# Altium PCB PCB1.PcbDoc
Units mil, origin at the board's own origin, x right, y up, seen from the top; angles counter-clockwise.
Board outline 2670 x 1265 mil, 2 copper layers (Top Layer, Bottom Layer); 14 components, 12 nets, 37 pads, 9 vias.
Unrouted connection lines stored in the file: 1.
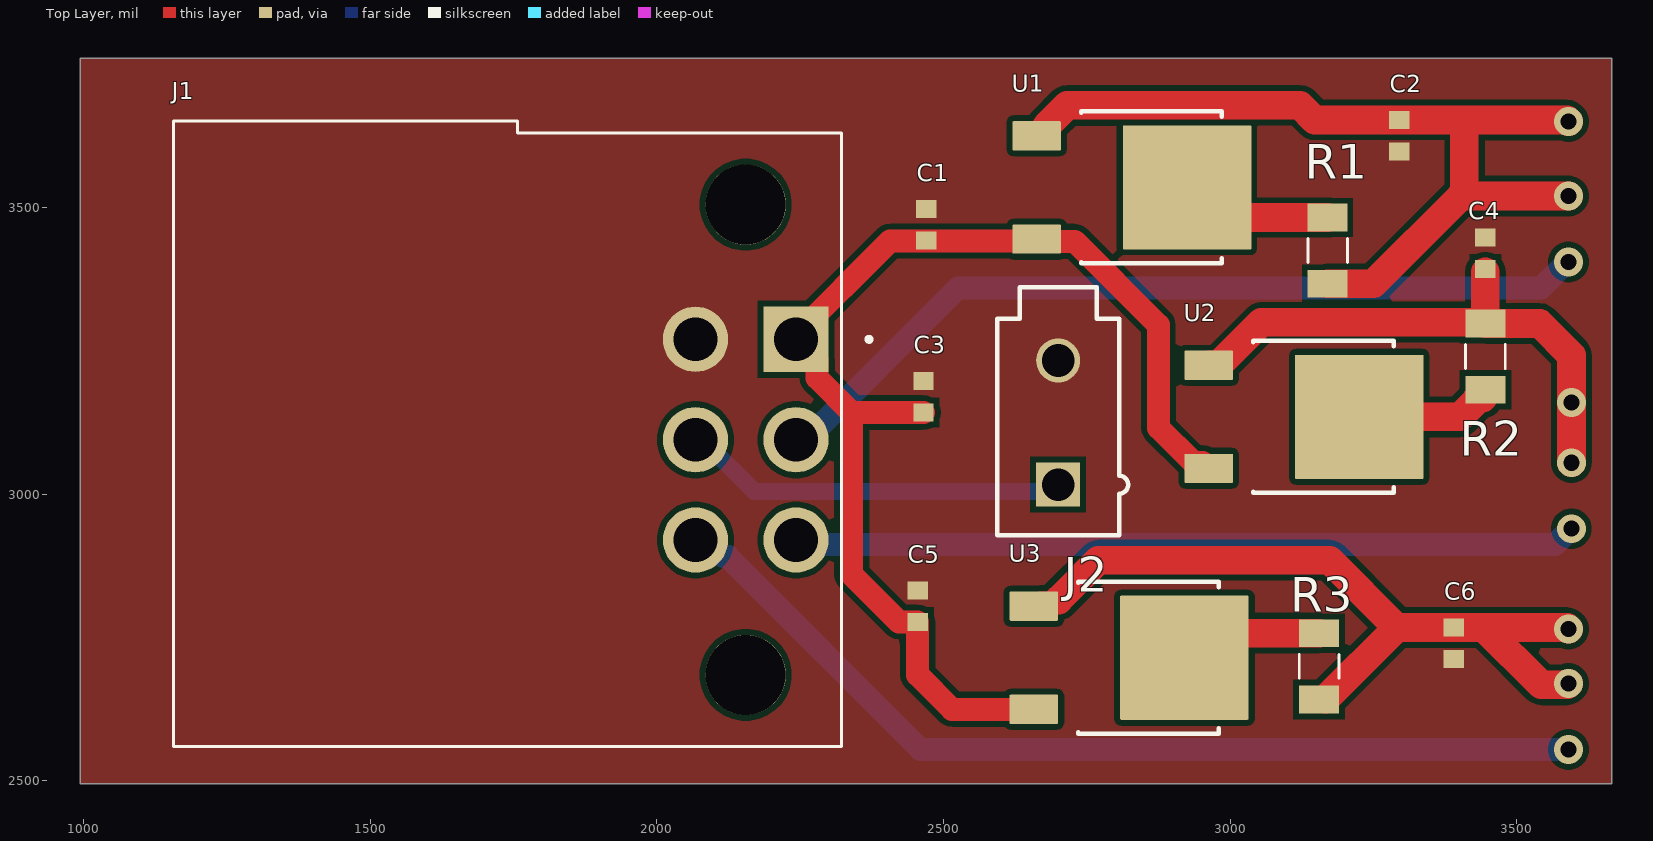
[diagram p0: Top Layer view]
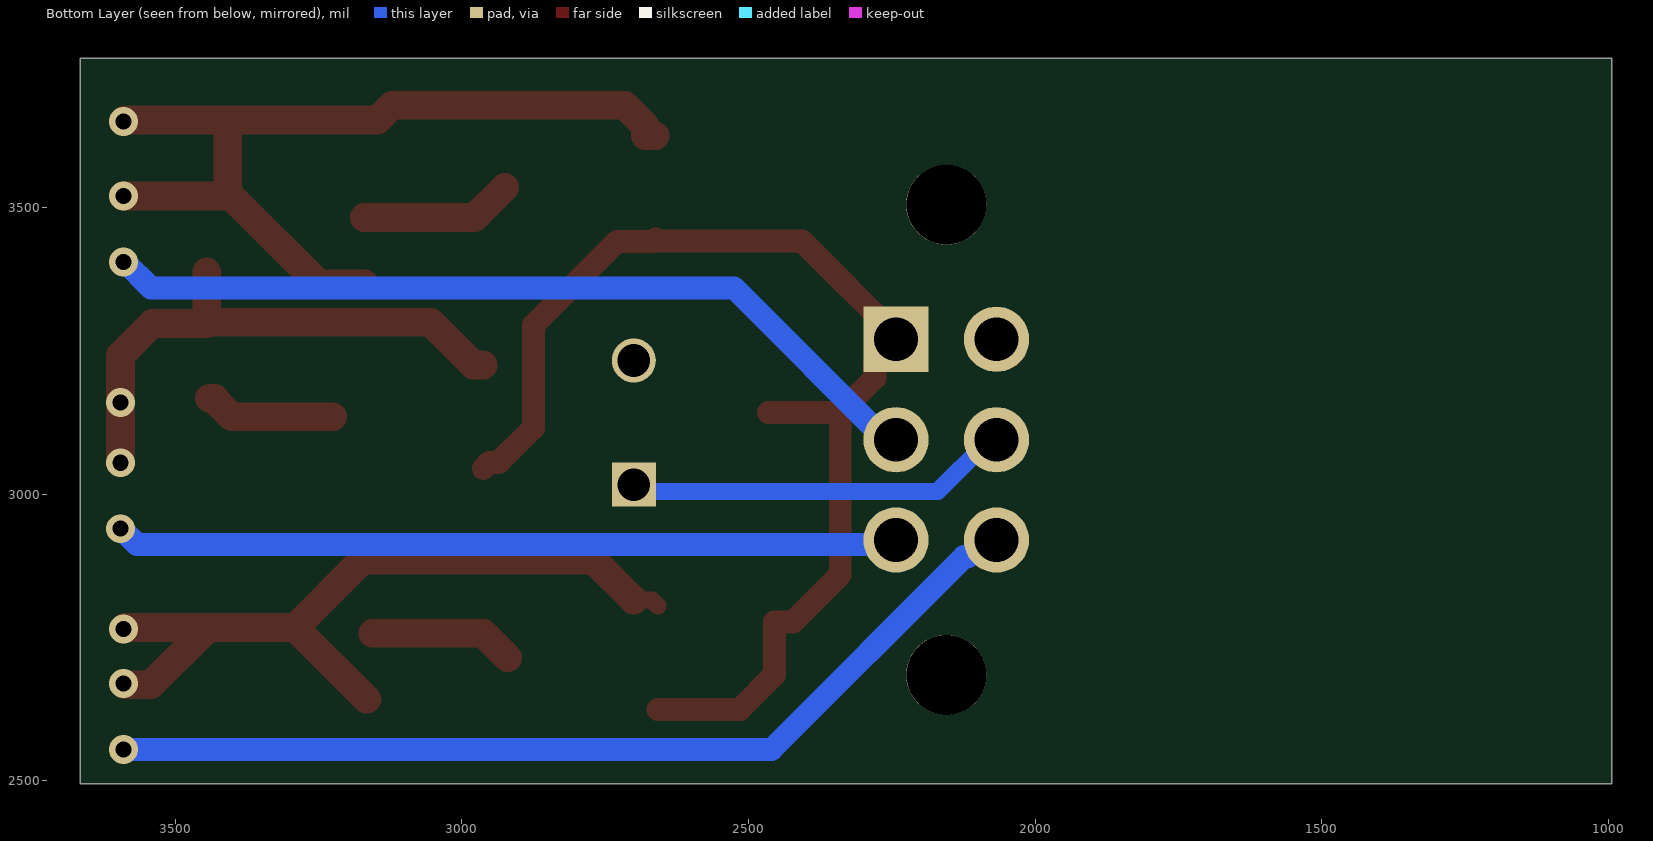
[diagram p1: Bottom Layer view, seen from below]

## Layer stack, top to bottom
Top Solder: solder mask 0.4, Solder Resist, Dk 3.5
Top Layer: signal copper 1.4
Dielectric 1: dielectric 12.6, FR-4, Dk 4.8
Bottom Layer: signal copper 1.4
Bottom Solder: solder mask 0.4, Solder Resist, Dk 3.5

## Board outline
995,3760 3665,3760 3665,2495 995,2495

## Design rules (kind name [scope] priority, off if disabled: settings)
Clearance [All] p1: gap=10 ignorepadtopadclearanceinfootprint=FALSE
PolygonConnect [All] p1: connectstyle=Direct reliefconductorwidth=10 reliefentries=4 polygonreliefangle="90 Angle" airgapwidth=10
RoutingVias [All] p1: holewidth=28 width=50 viastyle="Through Hole" minholewidth=28 minwidth=50 maxholewidth=28 maxwidth=50
SolderMaskExpansion [All] p1: expansion=4 istentingtop=FALSE
SupplyNets "Schematic Supply Nets_3" [InNet('Status_Light_PWR')] p1: voltage=0.000
SupplyNets "Schematic Supply Nets" [InNet('GND')] p2: voltage=0.000
Width [All] p1: maxlimit=50 minlimit=10 preferedwidth=10
30 further rules are at their usual default settings.

## Components (designator, comment, footprint, x,y, rotation, side; value= is the part's Value field where it differs from the comment)
C1 "Cap" 1608[0603] 2470,3470 r90 top
C2 "Cap" 1608[0603] 3295,3625 r90 top
C3 "Cap" 1608[0603] 2465,3170 r90 top
C4 "Cap" 1608[0603] 3445,3420 r270 top
C5 "Cap" 1608[0603] 2455,2805 r90 top
C6 "Cap" 1608[0603] 3390,2740 r90 top
J1 "DTF13-6P" TE_DTF13-6P 2155,3095.04 r270 top
J2 "39-28-1023" MOLX-39-28-1023-2_V 2700,3125 r180 top
R1 "3ohms" RESC3216X70N#1 3170,3425 r270 top
R2 "3ohms" RESC3216X70N#2 3445,3240 r90 top
R3 "3 ohms" RESC3216X70N#1 3155,2700 r270 top
U1 "LM317AMDTX/NOPB" FP-NDP0003B-MFG 2835,3535 r0 top
U2 "LM317AMDTX/NOPB" FP-NDP0003B-MFG 3135,3135 r0 top
U3 "LM317AMDTX/NOPB" FP-NDP0003B-MFG 2830.04,2715 r0 top

## Footprints (in the part's own frame and the unit in brackets; to place one, negate y for a bottom-side part, rotate by r counter-clockwise, add the part's x,y. Pads: shape width x height; smd on the part's side, far side on the other; paste and mask are expansions set on the pad)
1608[0603] [mm] "Chip Capacitor, Body 1.6x0.8mm, IPC High Density"
  rect 0.8x0.9 smd: 1(-0.7,0) 2(0.7,0)
  body extent -0.87,-0.48 0.87,0.48, height 1.3
FP-NDP0003B-MFG [mm]
  rrect8% 2.15x1.3 smd paste+0 mask+0: 1(-4.38,2.285) 3(-4.38,-2.285)
  rrect2% 5.7x5.5 smd paste-1000 mask+0: 4(2.285,0)
  silkscreen extent -2.41,-3.36 3.81,3.36, body extent -5.56,-3.46 5.23,3.46, height 0.25
MOLX-39-28-1023-2_V [mm] "THD, 2-Leads, Body 11x5.8mm"
  rect 1.95x1.95 hole 1.45: 1(0,2.75)
  round 1.95 hole 1.45: 2(0,-2.75)
  silkscreen extent -3.1,-6 2.7,5, body extent -3.1,-6 2.7,5, height 13.6
RESC3216X70N#1 [mm]
  rect 1.23x1.77 smd: 1(-1.466,0) 2(1.466,0)
  silkscreen extent -0.53,-0.88 0.53,0.88
RESC3216X70N#2 [mm]
  rect 1.23x1.77 smd: 2(-1.466,0) 2(1.466,0)
  silkscreen extent -0.53,-0.88 0.53,0.88
TE_DTF13-6P [mm]
  rect 2.895x2.895 / inner round 2.895 / far side rect 2.895x2.895 hole 1.93: 1(-4.45,2.23)
  round 2.895 hole 1.93: 2(0,2.23) 3(4.44,2.23) 4(4.44,-2.22) 5(0,-2.22) 6(-4.45,-2.22)
  round 3.55 hole 3.55 unplated: ""(-10.415,0) ""(10.415,0)
  silkscreen extent -14.12,-25.34 13.59,5.57, body extent -14.12,-25.34 13.59,4.25, height 22.35

## Part data
C1 C3 C5: "Capacitor", Supplier Part Number 1=81-GRM188R61E106MA3D, C2=10uF, LatestRevisionDate=17-Jul-2002, LatestRevisionNote="Re-released for DXP Platform.", PackageDescription="Radial Cap, Thru-Hole; 2 Leads; 0.3 in Pin Spacing", PackageReference=RAD-0.3, Published=8-Jun-2000, Publisher="Altium Limited", Supplier 1=Mouser
C2 C4 C6: "Capacitor", Supplier Part Number 1=445-5956-1-ND, C2=1uF, LatestRevisionDate=17-Jul-2002, LatestRevisionNote="Re-released for DXP Platform.", PackageDescription="Radial Cap, Thru-Hole; 2 Leads; 0.3 in Pin Spacing", PackageReference=RAD-0.3, Published=8-Jun-2000, Publisher="Altium Limited"
  C2 C6: Supplier 1=Digikey
  C4: Supplier 1=DigiKey
J1: "Conn Wire to Board RCP 6 POS 4.45mm Solder RA Thru-Hole Automotive Package", Package=None, Availability="In Stock", Check_prices=https://www.snapeda.com/parts/DTF13-6P/TE+Connectivity+Deutsch+Connectors/view-part/?ref=eda, EU_RoHS_Compliance="Compliant with Exemptions", MF="TE Connectivity", MP=DTF13-6P, Price=None, Purchase-URL=https://pricing.snapeda.com/search?q=DTF13-6P&ref=eda, SnapEDA_Link=https://www.snapeda.com/parts/DTF13-6P/TE+Connectivity+Deutsch+Connectors/view-part/?ref=snap
J2: library part CMP-2000-05244-1, "Female Header, Pitch 4.2 mm, 1 x 2 Position, Height 12.8 mm, Tail Length 3.5 mm, -40 to 105 degC, RoHS", Colour=Clear, Current Rating=13A, Flammability Rating=UL94V-2, Manufacturer=Molex, Voltage Rating V AC=600V, Working Voltage=250V, Connector Body Material=–, Connector Insert Type=Header, Connector Mounting=PCB, Connector Mounting Orientation=PCB, Connector Type=RectangularPower, Contact Gender=–, Contact Material=Brass, Contact Plating=Tin, Contact Termination=Solder, Datasheet URL=https://datasheet.ciiva.com/11746/0900766b80460d9e-11746456.pdf, Datasheet Version="Rev. F, 05/2004", Gender=Header, Lead Spacing=4.2mm, Manufacturer URL=http://www.molex.com/, Mounting Orientation=Straight, Mounting Type=PCBoard, MSL=–, No. of Contacts=4, No. of Poles=2, No. of Rows=1, No. of Ways=2, Pitch Spacing=4.2mm, Series=Mini-FitJr, SVHC=–, Termination Method=Solder
R1: library part RMCF1206FT3R00, Package=None, Supplier Part Number 1=6445357, Availability=Unavailable, MP=RMCF1206FT3R00, Price=None, Supplier 1="Future Electronics"
R2 R3: library part RMCF1206FT3R00, Package=None, Availability=Unavailable, MP=RMCF1206FT3R00, Price=None
U1 U2 U3: library part CMP-04917-000060-1, "IC REG LIN POS ADJ 1.5A TO252-3", Manufacturer="Texas Instruments", Max Supply Voltage=40V, Min Supply Voltage=4.2V, Nominal Supply Current=50uA, Output Current=1.5A, Output Voltage=1.25-37V, Package=NDP0003B, Temperature="-40°C to +125°C", Temperature Range High=+125°C, Temperature Range Low=-40°C, Accuracy Percentage=1%, Automotive=No, Category=IC, ComponentLink2Description=Datasheet, ComponentLink2URL=http://www.ti.com/lit/ds/symlink/lm317a.pdf, Device Class L1="Integrated Circuits (ICs)", Device Class L2="Power Management ICs", Device Class L3="Voltage Regulators - Linear", Digikey Description="IC REG LIN POS ADJ 1.5A TO252-3", Height=2.72mm, Lead Free=Yes, Manufacturer Part Number=LM317AMDTX/NOPB, Number Of Outputs=1, Octopart=https://octopart.com/lm317amdtx%2Fnopb-texas+instruments-24813637, Output Type=AdjustableProgrammable, RoHS=TRUE, Standoff Height=0.17mm

## Via types
v1: diameter 50, hole 28, Top Layer to Bottom Layer, 9 vias

## Nets (pads, with @x,y where several pads share a name; then routed paths per layer and width w, separated by ;. In a path a pad name is that pad's centre, name@x,y a point inside that pad or via, vN(x,y) a via of type N, cw(c..) or ccw(c..) an arc to the next point about the centre after c; other vN are vias at no path point)
AMBER_LED: C6.2 R3.2 U3.1 | length 1393
  Top Layer w30: U3.1 2668.19,2815.55 2700.55,2815.55 ; R3.2 R3.2@3165.63,2642.28
  Top Layer w50: 2700.55,2815.55 2770,2885 3173.46,2885 3290.91,2767.56 ; R3.2@3165.63,2642.28 3290.91,2767.56 ; v1(3590,2670) 3587.56,2667.56 3542.44,2667.56 3442.44,2767.56 ; v1(3590,2765) 3587.44,2767.56 3442.44,2767.56 ; 3290.91,2767.56 C6.2 3442.44,2767.56
AMBER_LED_GND: J1.4 | length 1673.7
  Bottom Layer w40: J1.4 2087.62,2920.24 2116.76,2891.1 2123.9,2891.1 2460,2555 v1(3590,2555)
Buzzer: J1.5 J2.1 | length 661.5
  Bottom Layer w30: J1.5@2077.48,3087.32 2087.68,3087.32 2170,3005 2688.27,3005 J2.1
GND: C1.2 C2.1 C3.2 C4.1 C5.2 C6.1 J1.6 J2.2
GREEN_LED: C4.2 R2.2@3445,3297.72 U2.1 | length 957.1
  Top Layer w50: U2.1 2963.15,3225.55 2979.88,3225.55 3054.33,3300 3437.72,3300 3445,3307.28 C4.2@3445,3387.44 ; R2.2@3445,3297.72 3539.84,3297.72 3595,3242.56 v1(3595,3160) v1(3595,3055)
GREEN_LED_GND: J1.3 | length 1351
  Bottom Layer w40: J1.3@2252.68,2912.52 3566.57,2912.52 3592.14,2938.09 v1@3593.09,2938.09
  other v1: 3595,2940
NetR1_1: R1.1 U1.4 | length 266.7
  Top Layer w50: U1.4 2977.24,3482.72 R1.1
NetR2_1: R2.2@3445,3182.28 U2.4 | length 229.7
  Top Layer w50: U2.4 3400.87,3135 3430.16,3164.29 3430.16,3166.5 3430.94,3167.28 R2.2@3440,3167.28
NetR3_1: R3.1 U3.4 | length 277.7
  Top Layer w30: U3.4@2945,2740 U3.4@2962.72,2757.72
  Top Layer w50: U3.4 2962.72,2757.72 R3.1
RED_LED: C2.2 R1.2 U1.1 | length 1589.2
  Top Layer w50: U1.1 2679.29,3624.96 2679.88,3625.55 2679.88,3642.28 2715.87,3678.27 3121.73,3678.27 3147.44,3652.56 C2.2 3408.22,3652.56 ; R1.2 3249.78,3367.28 3402.5,3520 ; v1(3590,3520) 3402.5,3520 ; v1(3590,3650) 3587.44,3652.56 3408.22,3652.56 ; 3402.5,3520 3408.22,3525.72 3408.22,3652.56
RED_LED_GND: J1.2 | length 1468.9
  Bottom Layer w40: J1.2@2252.68,3087.32 2525.36,3360 3542.29,3360 3587.29,3405 v1(3590,3405)
Status_Light_PWR: C1.1 C3.1 C5.1 J1.1 U1.3 U2.3 U3.3 | length 2111
  Top Layer w40: 2340,3139.44 2340,2859.72 2422.28,2777.44 C5.1 2455,2685 2514.96,2625.04 U3.3 ; C3.1 2340,3142.44 2279.78,3202.66 2279.78,3235.41 2240.2,3275 2407.09,3441.9 2470,3441.9 2659.42,3441.9 U1.3 2666.54,3441.06 2728.94,3441.06 2875,3295 2875,3115.87 2935.24,3055.63 2951.97,3055.63 U2.3
pads on no net: J1.

## Polygon pours and split planes (outlines as drawn)
GND on Top Layer "GND_L01_P000" (solid, pour order 0): 995,3760 995,2495 3665,2495 3665,3760